# EAGLE board RJ45_Adapter_v62 (EAGLE 9.7.0)
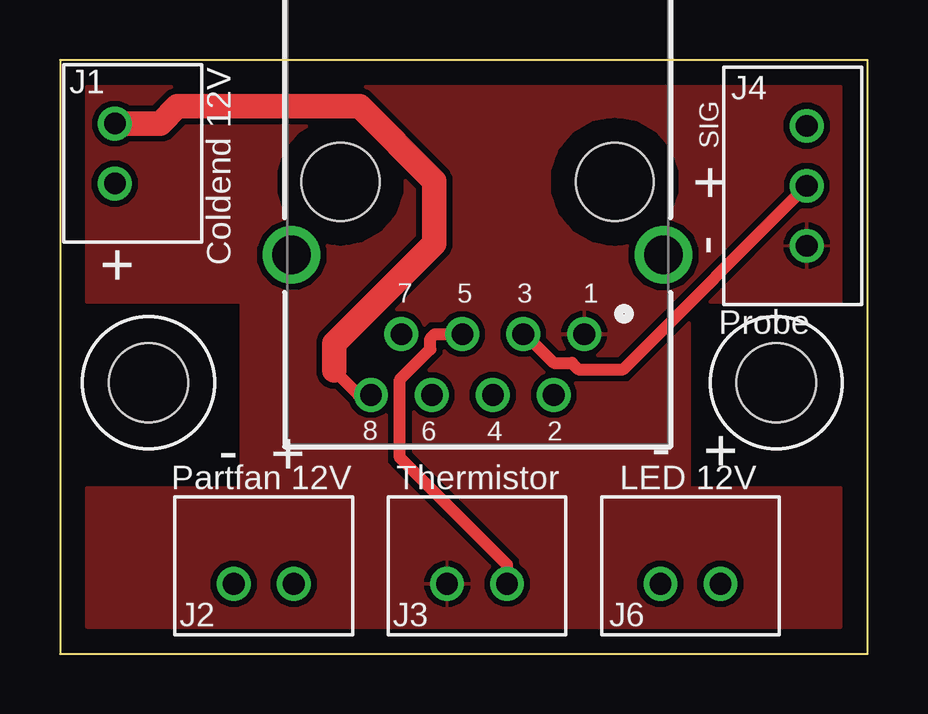
[diagram p0: board, top side]
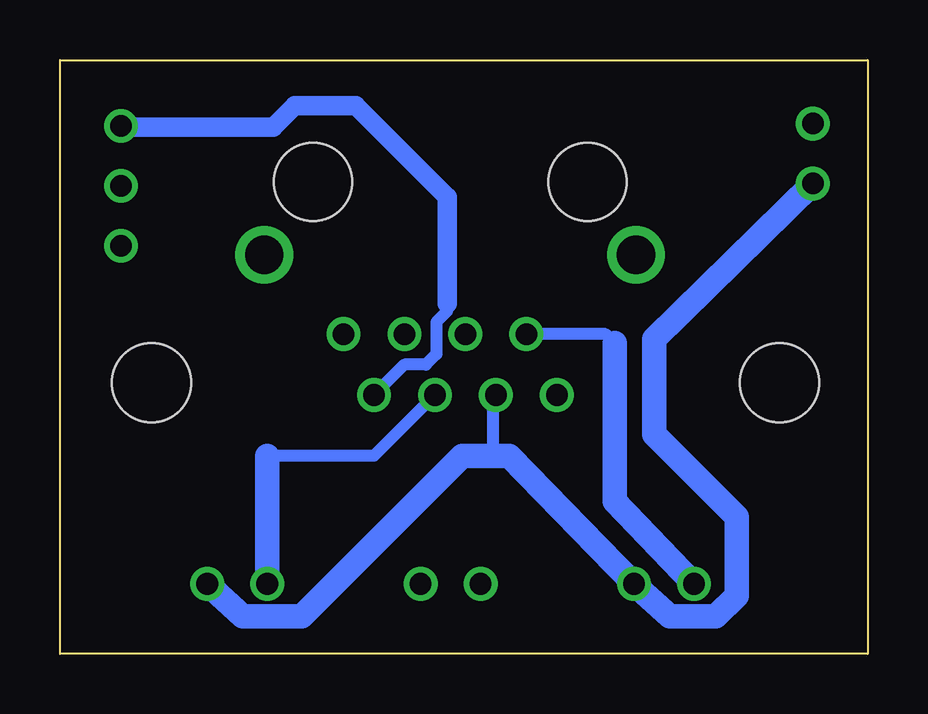
[diagram p1: board, bottom side, seen from below]

Size 33.66 x 24.77 mm. Coordinates in mm from the lower left corner, seen from the top.
Outline: 33.66,0 33.66,24.77 0,24.77 0,0 33.66,0
Copper layers (1*16): Top 0.035mm / dielectric 1.5mm / Bottom 0.035mm
Design rules "default": minimum track width 6mil, minimum drill 0.35mm, track to track 6mil, track to pad 6mil, pad to pad 6mil, via to via 6mil, smd to smd 6mil, copper to edge 40mil, drill to drill 6mil, minimum pad ring 10mil, minimum via ring 8mil, stop-mask expansion 4mil, vias tented up to drill 0mil, thermal gap 10mil
Net classes: 0 default: width 0.508 mm, clearance 0.254 mm
Holes 3.3 mm at 29.84,11.3 3.68,11.3

## Footprints (pad centres in the part's own frame; a part is rotated, then mirrored left to right if it is on the bottom)
B2B-XH-A = drill 0.9: 1 0,-1.27; 2 2.5,-1.27
B3B-XH-A = drill 0.9: 1 0,0; 2 2.5,0; 3 5,0
7499011002A = drill 0.9: 1 4.445,-6.35; 2 3.175,-8.89; 3 1.905,-6.35; 4 0.635,-8.89; 5 -0.635,-6.35; 6 -1.905,-8.89; 7 -3.175,-6.35; 8 -4.445,-8.89 | drill 1.6: Z1 -7.745,-3.05; Z2 7.745,-3.05 | hole 3.25: 5.715,0; -5.715,0

## Placement (x,y rotation side)
J1  Coldend 12V  [B2B-XH-A]  3.56,22.11 270 top
J2  Partfan 12V  [B2B-XH-A]  7.24,4.19 0 top
J3  Thermistor  [B2B-XH-A]  16.13,4.19 0 top
J4  Probe  [B3B-XH-A]  31.12,17.02 90 top
J6  LED 12V  [B2B-XH-A]  25.02,4.19 0 top
T1  7499011002A  [7499011002A]  17.4,19.69 0 top

## Library data of the parts
J1-J3 J6 = ConnectorVelo17; CATEGORY: CONNECTOR; DESCRIPTION: 2.5mm pitch/disconnectable crimp style connector; MANUFACTURER: JST (XH CONNECTOR); MPN: B2B-XH-A; OPERATING_TEMPERATURE: -25°C ~ 85°C; PART_STATUS: ACTIVE; ROHS_COMPLIANT: COMPLIANT; SERIES: B_B-XH-A; SUB_CATEGORY: Through hole connector; TYPE: top entry
J4 = XH3; CATEGORY: CONNECTOR; DESCRIPTION: 2.5mm pitch/disconnectable crimp style connector; MANUFACTURER: JST (XH connector); MPN: B3B-XH-A; PART_STATUS: ACTIVE; ROHS_COMPLIANT: COMPLIANT; SERIES: B3B-XH-A; SUB_CATEGORY: THROUGH HOLE CONNECTOR; TYPE: SIDE ENTRY
T1 = Wurth_Signal & Communications_WE-RJ45_LAN; DATA-RATE: 10/100 Base-T; DATASHEET-URL: https://www.we-online.com/catalog/datasheet/7499011002A.pdf; LED: -; MOUNT: THT; PART-NUMBER: 7499011002A; POE: non-PoE; PORTS: 1; USB: No

## Nets
+5V: J4.2 T1.3
+12V: J1.2 J2.2 J6.2 T1.6
GND: J3.1 J4.1 T1.1
N$1: J4.3 T1.2
N$2: J3.2 T1.5
N$3: J6.1 T1.4
N$4: J2.1 T1.7
N$5: J1.1 T1.8

## Tracks (layer width: path | path; a pad name or v marks a point on that pad's centre or on a via)
+5V
  Top 0.508: J4.2 23.47,11.87 21.59,11.87 21.33,12.13 20.57,12.13 19.37,13.34 T1.3
+12V
  Bottom 0.508: T1.6 15.62,10.67 15.62,8.26
  Bottom 1.016: J1.2 8.89,13.14 8.89,9.14 5.46,5.72 5.46,2.43 6.33,1.56 8.25,1.56 J2.2 14.95,8.26 15.62,8.26 16.89,8.26 23.58,1.56 26.03,1.56 J6.2
GND
  pour Top: 0.13,24.76 0.13,0.13 33.71,0.13 33.71,24.76
N$1
  Bottom 0.508: 17.53,14.6 17.53,14.29 17.98,13.84 17.98,12.5 18.41,12.07 19.3,12.07 T1.2
  Bottom 0.813: J4.3 31.07,21.97 24.77,21.97 23.88,22.86 21.34,22.86 17.53,19.05 17.53,14.6
N$2
  Top 0.508: J3.2 18.63,3.72 14.17,8.19 14.17,11.44 15.44,12.71 15.44,13.15 15.62,13.34 T1.5
N$3
  Bottom 0.508: T1.4 20.57,8.26 25.02,8.26
  Bottom 1.016: 25.02,8.26 J6.1
N$4
  Bottom 0.508: 10.54,12.95 10.92,13.34 T1.7
  Bottom 1.016: J2.1 10.54,6.35 10.54,12.95
N$5
  Top 0.508: 11.43,11.81 12.45,10.8 T1.8
  Top 1.016: J1.1 4.17,22.11 4.9,22.84 12.48,22.84 15.6,19.72 15.6,17.11 11.43,12.95 11.43,11.81
(copper drawn outside any net)
  shapes: Bottom area x2, Top area x2

## Text on the board
tNames: SIG | + | - | + | - | + | - | +